# EAGLE board PCB (EAGLE 9.7.0)
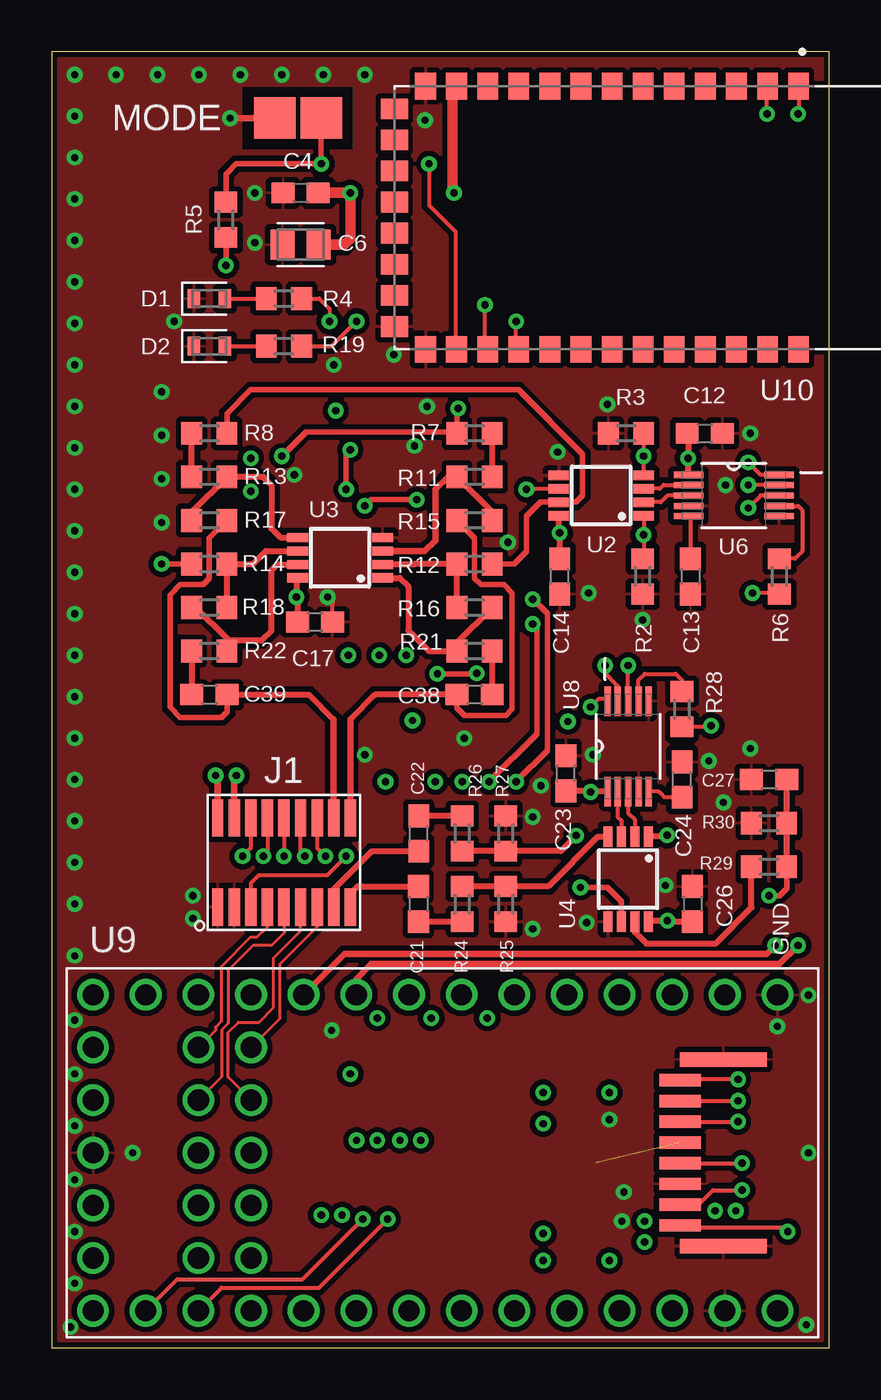
[diagram p0: board, top side]
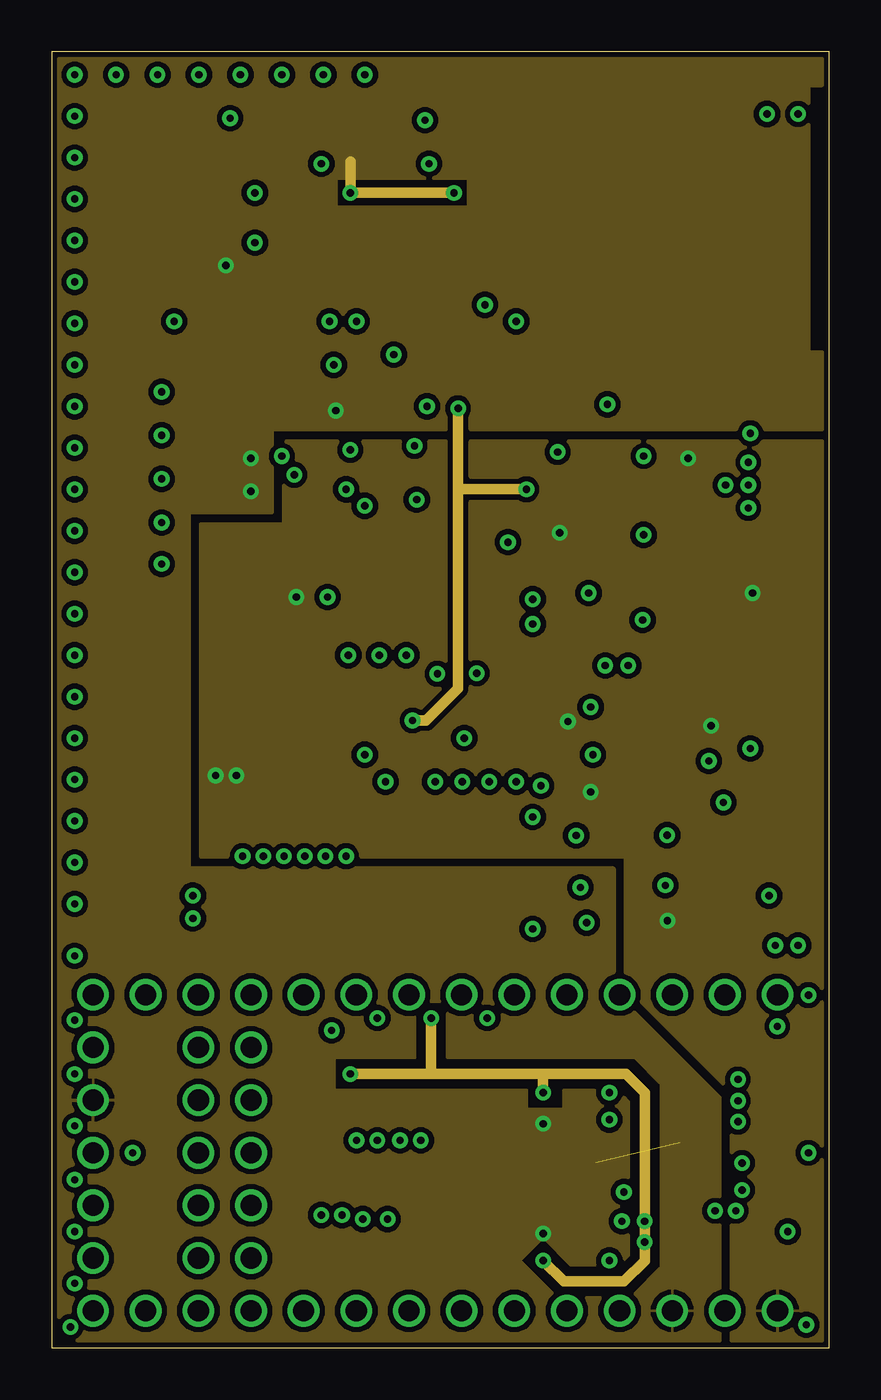
[diagram p1: board, inner layer Route2]
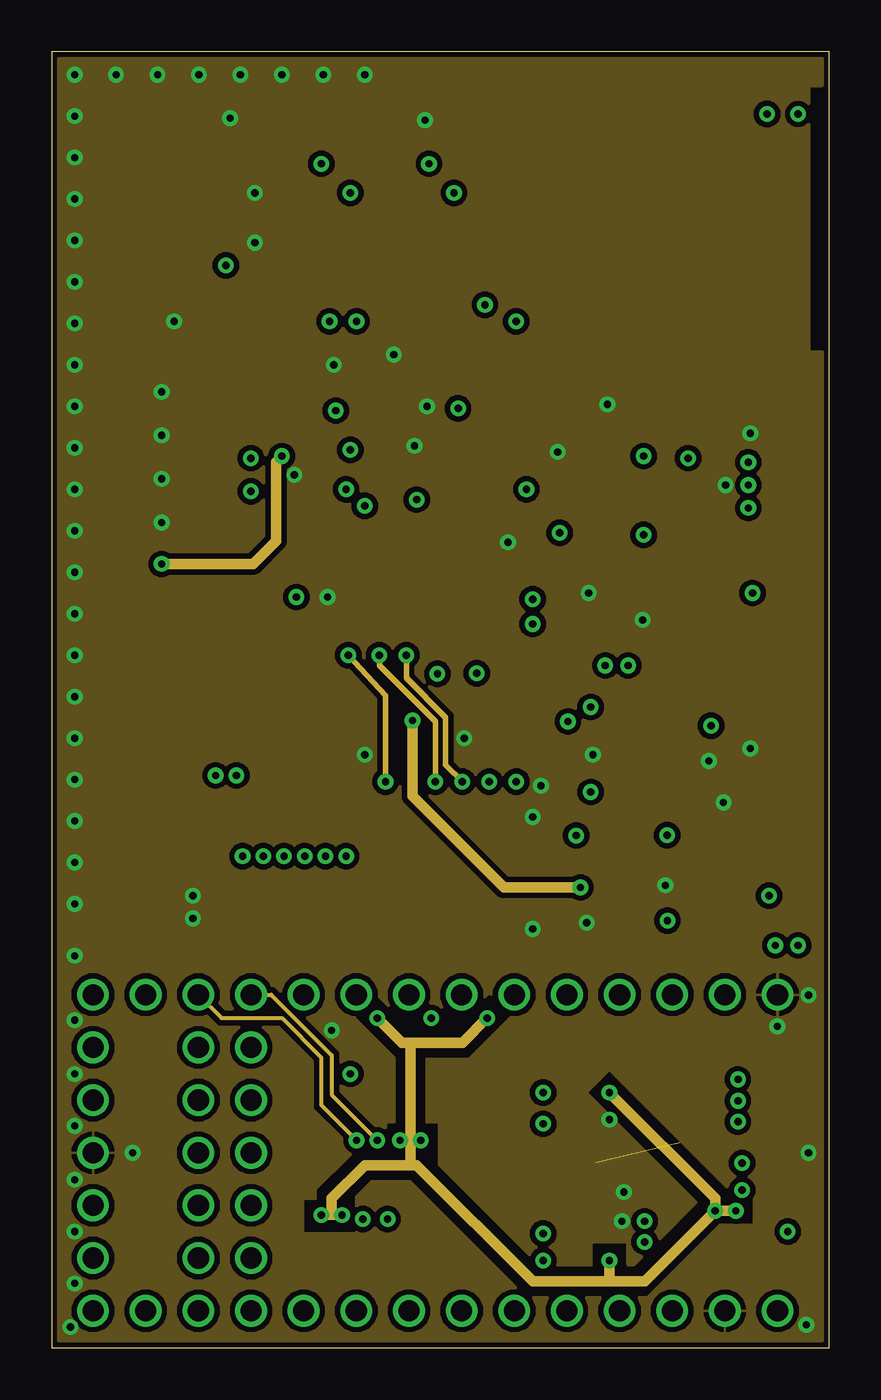
[diagram p2: board, inner layer Route15]
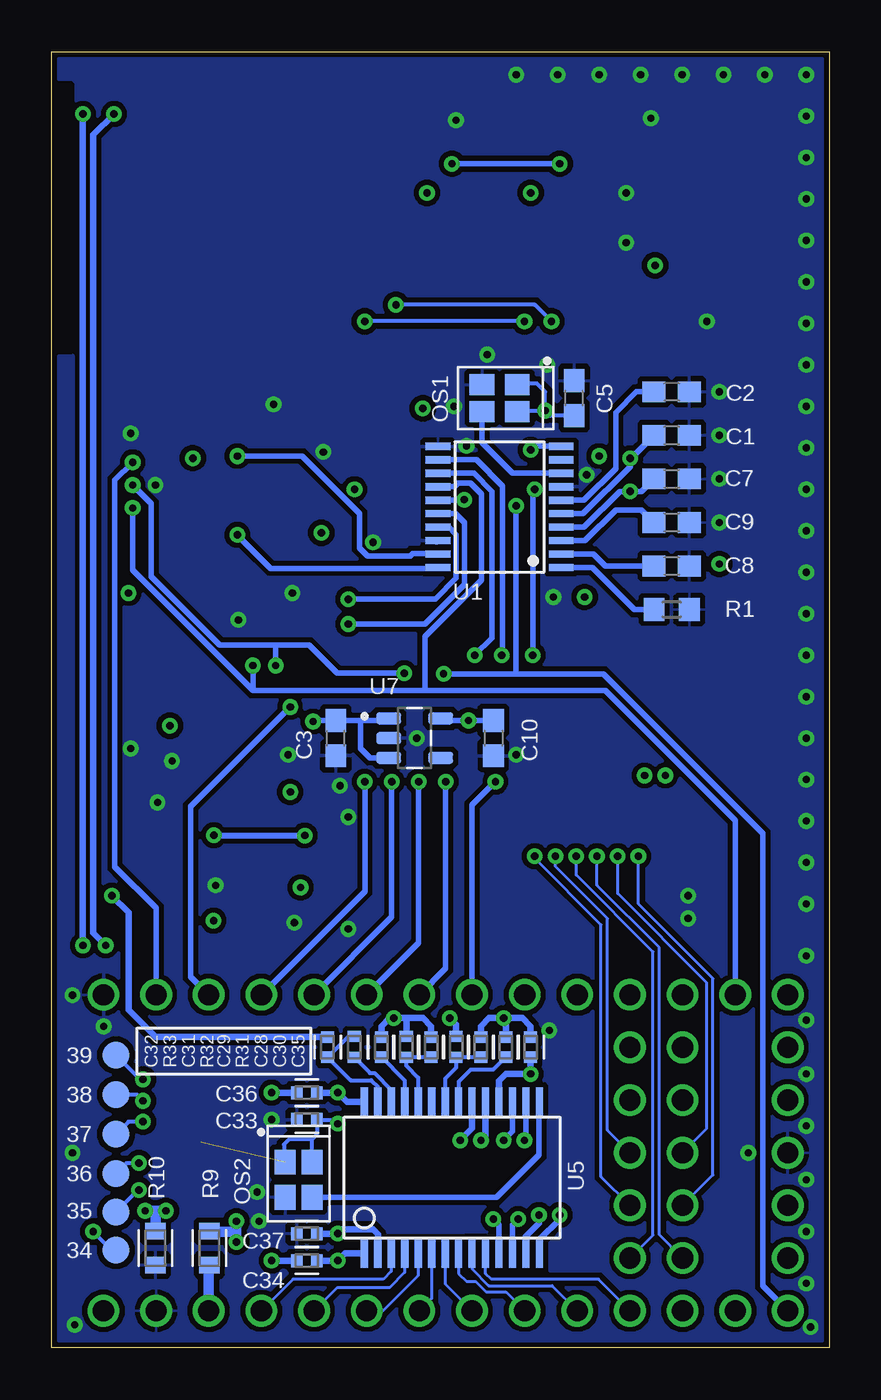
[diagram p3: board, bottom side, seen from below]

Size 37.5 x 62.5 mm. Coordinates in mm from the lower left corner, seen from the top.
Outline: 0,0 37.5,0 37.5,62.5 0,62.5 0,0
Copper layers (1+2*15+16): Top 0.035mm / dielectric 1.5mm / Route2 0.035mm / dielectric 0.15mm / Route15 0.035mm / dielectric 0.2mm / Bottom 0.035mm
Design rules "default *": minimum track width 6mil, minimum drill 0.35mm, track to track 6mil, track to pad 6mil, pad to pad 6mil, via to via 6mil, smd to smd 6mil, copper to edge 10mil, drill to drill 6mil, minimum pad ring 10mil, minimum via ring 8mil, stop-mask expansion 2mil, vias tented up to drill 15mil, thermal gap 10mil
tKeepout: area 0,18.6 to 6,62.5

## Footprints (pad centres in the part's own frame; a part is rotated, then mirrored left to right if it is on the bottom)
TP13R = smd 1.3 x 1.3: TP 0,0
C0603 = smd 1.1 x 1: 1 -0.85,0; 2 0.85,0
CAPC2012X110 = smd 1.165 x 1.465: 1 -0.875,0; 2 0.875,0
CAPC1005X60 = smd 0.56 x 0.629: 1 -0.485,0; 2 0.485,0
LEDC1608X65N_RND-R = smd 0.612 x 0.912: A 0.75,0; C -0.75,0
MOLEX_53307-1871 = smd 0.55 x 1.8: P$1 3.2,2.15; P$2 3.2,-2.15; P$3 2.4,2.15; P$4 2.4,-2.15; P$5 1.6,2.15; P$6 1.6,-2.15; P$7 0.8,2.15; P$8 0.8,-2.15; P$9 0,2.15; P$10 0,-2.15; P$11 -0.8,2.15; P$12 -0.8,-2.15; P$13 -1.6,2.15; P$14 -1.6,-2.15; P$15 -2.4,2.15; P$16 -2.4,-2.15; P$17 -3.2,2.15; P$18 -3.2,-2.15
2.5X2-4-PAD = smd 1.2 x 1: 1 -0.85,-0.65; 2 0.85,-0.65; 3 0.85,0.65; 4 -0.85,0.65
R0603 = smd 1 x 1.1: 1 -0.85,0; 2 0.85,0
RESC1608X60 = smd 0.799 x 0.974: 1 -0.815,0; 2 0.815,0
RESC1005X40 = smd 0.535 x 0.644: 1 -0.507,0; 2 0.507,0
TP20SQ = smd 2 x 2: TP 0,0
TSSOP20 = smd 0.35 x 1.2: 1 -2.275,-2.97; 2 -1.625,-2.97; 3 -0.975,-2.97; 4 -0.325,-2.97; 5 0.325,-2.97; 6 0.975,-2.97; 7 1.625,-2.97; 8 2.275,-2.97; 9 2.925,-2.97; 10 3.575,-2.97; 11 3.575,2.97; 12 2.925,2.97; 13 2.275,2.97; 14 1.625,2.97; 15 0.975,2.97; 16 0.325,2.97; 17 -0.325,2.97; 18 -0.975,2.97; 19 -1.625,2.97; 20 -2.275,2.97
MSOP8 = smd 0.45 x 1: 1 -0.975,-2.05; 2 -0.325,-2.05; 3 0.325,-2.05; 4 0.975,-2.05; 5 0.975,2.05; 6 0.325,2.05; 7 -0.325,2.05; 8 -0.975,2.05
SSOP28BU = smd 0.348 x 1.397: 1 -4.225,-3.656; 2 -3.575,-3.656; 3 -2.925,-3.656; 4 -2.275,-3.656; 5 -1.625,-3.656; 6 -0.975,-3.656; 7 -0.325,-3.656; 8 0.325,-3.656; 9 0.975,-3.656; 10 1.625,-3.656; 11 2.275,-3.656; 12 2.925,-3.656; 13 3.575,-3.656; 14 4.225,-3.656; 15 4.225,3.656; 16 3.575,3.656; 17 2.925,3.656; 18 2.275,3.656; 19 1.625,3.656; 20 0.975,3.656; 21 0.325,3.656; 22 -0.325,3.656; 23 -0.975,3.656; 24 -1.625,3.656; 25 -2.275,3.656; 26 -2.925,3.656; 27 -3.575,3.656; 28 -4.225,3.656
SOP50P490X110-10N = smd 1.422 x 0.305: 1 -2.184,0.991; 2 -2.184,0.508; 3 -2.184,0; 4 -2.184,-0.508; 5 -2.184,-0.991; 6 2.184,-0.991; 7 2.184,-0.508; 8 2.184,0; 9 2.184,0.508; 10 2.184,0.991
SOT95P280X145-5N = smd 1.21 x 0.59: 1 -1.255,0.95; 2 -1.255,0; 3 -1.255,-0.95; 4 1.255,-0.95; 5 1.255,0.95
MODULE_DEV-15583 = drill 1.02: 0 -7.62,13.97; 1 -7.62,11.43; 2 -7.62,8.89; 3 -7.62,6.35; 3.3V_1 -2.54,-16.51; 3.3V_2 7.62,11.43; 4 -7.62,3.81; 5 -7.62,1.27; 6 -7.62,-1.27; 7 -7.62,-3.81; 8 -7.62,-6.35; 9 -7.62,-8.89; 10 -7.62,-11.43; 11 -7.62,-13.97; 12 -7.62,-16.51; 13 7.62,-16.51; 14 7.62,-13.97; 15 7.62,-11.43; 16 7.62,-8.89; 17 7.62,-6.35; 18 7.62,-3.81; 19 7.62,-1.27; 20 7.62,1.27; 21 7.62,3.81; 22 7.62,6.35; 23 7.62,8.89; 24 5.08,-11.43; 25 5.08,-8.89; 26 2.54,-11.43; 27 2.54,-8.89; 28 0,-11.43; 29 0,-8.89; 30 -2.54,-11.43; 31 -2.54,-8.89; 32 -5.08,-11.43; 33 -5.08,-8.89; G_1 -7.62,16.51; G_2 0,-16.51; G_3 7.62,13.97; ON-OFF 5.08,-16.51; PGM 2.54,-16.51; VBAT -5.08,-16.51; VIN 7.62,16.51 | smd 0.6 x 2: 3.3V_3 -0.5,11.8; 34 3.5,11.8; 35 2.5,11.8; 36 0.5,11.8; 37 -1.5,11.8; 38 -2.5,11.8; 39 -3.5,11.8; G_4 1.5,11.8 | smd 0.7 x 4.2: G_5 4.5,13.9; G_6 -4.5,13.9
HM-10 = smd 1.3 x 1: 1 -6.35,6.325; 2 -6.35,4.825; 3 -6.35,3.325; 4 -6.35,1.825; 5 -6.35,0.325; 6 -6.35,-1.175; 7 -6.35,-2.675; 8 -6.35,-4.175; 9 -6.35,-5.675; 10 -6.35,-7.175; 11 -6.35,-8.675; 12 -6.35,-10.175; 13 -6.35,-11.675; 22 6.35,-11.675; 23 6.35,-10.175; 24 6.35,-8.675; 25 6.35,-7.175; 26 6.35,-5.675; 27 6.35,-4.175; 28 6.35,-2.675; 29 6.35,-1.175; 30 6.35,0.325; 31 6.35,1.825; 32 6.35,3.325; 33 6.35,4.825; 34 6.35,6.325 | smd 1 x 1.3: 14 -5.25,-13.175; 15 -3.75,-13.175; 16 -2.25,-13.175; 17 -0.75,-13.175; 18 0.75,-13.175; 19 2.25,-13.175; 20 3.75,-13.175; 21 5.25,-13.175

## Placement (x,y rotation side)
34  TPTP13R  [TP13R]  34.4,4.7 0 bottom
35  TPTP13R  [TP13R]  34.4,6.55 0 bottom
36  TPTP13R  [TP13R]  34.4,8.4 0 bottom
37  TPTP13R  [TP13R]  34.4,10.3 0 bottom
38  TPTP13R  [TP13R]  34.4,12.2 0 bottom
39  TPTP13R  [TP13R]  34.4,14.1 0 bottom
C1  0.1u  [C0603]  7.6,44 180 bottom
C2  0.1u  [C0603]  7.6,46.1 180 bottom
C3  1u  [C0603]  23.8,29.4 90 bottom
C4  0.1u  [C0603]  12,55.7 0 top
C5  0.1u  [C0603]  12.3,45.8 90 bottom
C6  10u  [CAPC2012X110]  12,53.2 0 top
C7  0.1u  [C0603]  7.6,41.9 0 bottom
C8  10n  [C0603]  7.6,37.7 0 bottom
C9  10n  [C0603]  7.6,39.8 0 bottom
C10  1u  [C0603]  16.2,29.4 270 bottom
C12  0.1u  [C0603]  31.5,44.1 0 top
C13  1u  [C0603]  30.8,37.2 270 top
C14  0.1u  [C0603]  24.5,37.2 90 top
C17  0.1u  [C0603]  12.7,35 180 top
C21  47n  [C0603]  17.68,21.4 270 top
C22  47n  [C0603]  17.7,24.8 90 top
C23  0.1u  [C0603]  24.8,27.7 90 top
C24  1u  [C0603]  30.4,27.4 90 top
C26  0.1u  [C0603]  30.9,21.4 270 top
C27  100p  [C0603]  34.6,27.4 180 top
C28  0.1u  [CAPC1005X60]  16.8,14.5 270 bottom
C29  0.1u  [CAPC1005X60]  19.2,14.5 270 bottom
C30  0.1u  [CAPC1005X60]  15.6,14.5 270 bottom
C31  0.1u  [CAPC1005X60]  21.6,14.5 270 bottom
C32  2.7n  [CAPC1005X60]  24.2,14.5 270 bottom
C33  0.1u  [CAPC1005X60]  25.2,11 180 bottom
C34  0.1u  [CAPC1005X60]  25.2,4.2 180 bottom
C35  0.1u  [CAPC1005X60]  14.4,14.5 90 bottom
C36  0.1u  [CAPC1005X60]  25.2,12.3 180 bottom
C37  0.1u  [CAPC1005X60]  25.2,5.5 180 bottom
C38  2.2u  [C0603]  20.4,31.5 180 top
C39  2.2u  [C0603]  7.6,31.5 0 top
D1  LED_RED  [LEDC1608X65N_RND-R]  7.6,50.6 0 top
D2  LED_RED  [LEDC1608X65N_RND-R]  7.6,48.3 0 top
J1  MOLEX_53307-1871  [MOLEX_53307-1871]  11.2,23.4 180 top
OS1  OSC-OE-IQXO-793  [2.5X2-4-PAD]  15.9,45.8 180 bottom
OS2  OSC-OE-IQXO-793  [2.5X2-4-PAD]  25.6,8.1 270 bottom
R1  20k  [R0603]  7.6,35.6 0 bottom
R2  220  [R0603]  28.5,37.2 270 top
R3  220  [R0603]  27.7,44.1 180 top
R4  470  [R0603]  11.2,50.6 180 top
R5  1k  [R0603]  8.4,54.4 270 top
R6  10k  [R0603]  35.1,37.2 270 top
R7  220  [R0603]  20.4,44.1 180 top
R8  220  [R0603]  7.6,44.1 0 top
R9  0  [RESC1608X60]  29.9,4.8 270 bottom
R10  0  [RESC1608X60]  32.5,4.8 270 bottom
R11  47k  [R0603]  20.4,42 180 top
R12  47k  [R0603]  20.4,37.8 180 top
R13  47k  [R0603]  7.6,42 0 top
R14  47k  [R0603]  7.6,37.8 0 top
R15  47k  [R0603]  20.4,39.9 180 top
R16  47k  [R0603]  20.4,35.7 180 top
R17  47k  [R0603]  7.6,39.9 0 top
R18  47k  [R0603]  7.6,35.7 0 top
R19  470  [R0603]  11.2,48.3 180 top
R21  220  [R0603]  20.4,33.6 180 top
R22  220  [R0603]  7.6,33.6 0 top
R24  47k  [R0603]  19.8,21.4 270 top
R25  47k  [R0603]  21.9,21.4 90 top
R26  47k  [R0603]  19.8,24.8 90 top
R27  47k  [R0603]  21.9,24.8 270 top
R28  10k  [R0603]  30.4,30.8 270 top
R29  4.7k  [R0603]  34.6,23.2 180 top
R30  10k  [R0603]  34.6,25.3 0 top
R31  1k  [RESC1005X40]  18,14.5 90 bottom
R32  1k  [RESC1005X40]  20.4,14.5 90 bottom
R33  47k  [RESC1005X40]  22.9,14.5 270 bottom
TP1  TPTP20SQ  [TP20SQ]  13,59.3 0 top
TP8  TPTP20SQ  [TP20SQ]  10.75,59.3 0 top
U1  AD5930  [TSSOP20]  15.9,39.9 90 bottom
U2  AD8220ARMZ  [MSOP8]  26.5,41.1 90 top
U3  ADA4841-2YRMZ  [MSOP8]  13.9,38.1 90 top
U4  AD8220ARMZ  [MSOP8]  27.8,22.6 180 top
U5  ADS901E  [SSOP28BU]  18.2,8.2 0 bottom
U6  AD5270BRMZ-100  [SOP50P490X110-10N]  32.9,41.1 0 top
U7  TLV73325PDBVT  [SOT95P280X145-5N]  20,29.4 0 bottom
U8  AD5270BRMZ-100  [SOP50P490X110-10N]  27.8,29 90 top
U9  DEV-15583  [MODULE_DEV-15583]  18.5,9.4 270 top
U10  HM-10  [HM-10]  29.7,54.5 270 top

## Library data of the parts
34-39 TP1 TP8 = testpad
C1-C5 C7-C10 C12-C14 C17 C21-C24 C26 C27 C38 C39 = rcl; SPICEPREFIX: C
C6 C28-C37 = Capacitor; CATEGORY: Capacitor
D1 D2 = LED; CATEGORY: LED; COLOR: RED; DESCRIPTION: CHIP LED ROUND; SUB-CATEGORY: CHIP; TYPE: ROUND_TOP
J1 = Molex 53307-1871
OS1 OS2 = IQD-Frequency-Products
R1-R8 R11-R19 R21 R22 R24-R30 = rcl; SPICEPREFIX: R
R9 R10 R31-R33 = Resistor; CATEGORY: Resistor; SUB-CATEGORY: Fixed
U1 = AD5930; AVAILABILITY: In Stock; DESCRIPTION: Direct Digital Synthesis IC 10 b 50MHz 24 b Tuning 20-TSSOP; MF: Analog Devices; MP: AD5930; PACKAGE: TSSOP-20 Analog Devices; PRICE: None
U2-U4 = ESP32_EIT
U5 = burr-brown; MF: TEXAS INSTRUMENT CONNECTORS; MPN: ADS901E; OC_FARNELL: 1509526; OC_NEWARK: 35C1591
U6 U8 = AD5270BRMZ-100; AVAILABILITY: In Stock; DESCRIPTION: Digital Potentiometer 100k Ohm 1 Circuit 1024 Taps SPI Interface 10-MSOP; MF: Analog Devices; MP: AD5270BRMZ-100; PACKAGE: MSOP-10 Analog Devices; PRICE: None
U7 = TLV73325PDBVT; AVAILABILITY: In Stock; DESCRIPTION: 300-mA, capacitor-free, low-IQ, low-dropout voltage regulator with enable 5-SOT-23 -40 to 125; MF: Texas Instruments; MP: TLV73325PDBVT; PACKAGE: SOT-23-5 Texas Instruments; PRICE: None; PURCHASE-URL: https://pricing.snapeda.com/search/part/TLV73325PDBVT/?ref=eda
U9 = DEV-15583; AVAILABILITY: In Stock; DESCRIPTION: RT1062 Teensy 4.0 i.MX ARM® Cortex®-M7 MPU Embedded Evaluation Board; MF: SparkFun Electronics; MP: DEV-15583; PACKAGE: None; PRICE: None; PURCHASE-URL: https://pricing.snapeda.com/search/part/DEV-15583/?ref=eda
U10 = HM-10; AVAILABILITY: No availability data; DESCRIPTION: Bluetooth to Serial Port Module; MF: ITead Studio; MP: HC-05; PACKAGE: Module ITead Studio; PRICE: None

## Nets
2.5V: C10.1 R7.2 R14.1 U2.6 U4.6 U7.5
+3V3 [Pour]: C1.2 C4.2 C5.1 C6.2 C7.1 C33.1 C37.1 OS1.1 OS1.4 OS2.1 OS2.4 R5.2 R9.2 U1.4 U1.5 U5.2 U9.3.3V_1 U9.3.3V_2 U9.3.3V_3 U10.12
+5V [Pour]: C3.2 C12.1 C14.2 C17.2 C23.1 C26.2 J1.P$2 J1.P$4 R6.2 R28.2 U2.8 U3.8 U4.8 U6.1 U7.1 U7.3 U8.1 U9.VIN
+V: C34.1 C35.1 C36.1 R9.1 R31.2 U5.1 U5.18 U5.28
ADC_0: U5.12 U9.14
ADC_1: U5.11 U9.15
ADC_2: U5.10 U9.16
ADC_3: U5.9 U9.17
ADC_4: U5.8 U9.18
ADC_5: U5.7 U9.19
ADC_6: U5.6 U9.20
ADC_7: U5.5 U9.21
ADC_8: U5.4 U9.22
ADC_9: U5.3 U9.23
AGND: C28.1 C29.1 C30.1 C31.1 C34.2 C35.2 C36.2 R10.1 R32.2 U5.13 U5.14 U5.19 U5.20
CS_AD5930: U1.16 U9.3
CS_DRIVE: U6.10 U9.0
CS_MEAS: U8.10 U9.1
CS_MUX1: J1.P$10 U9.24
CS_MUX2: J1.P$8 U9.28
CS_MUX3: J1.P$9 U9.30
CS_MUX4: J1.P$7 U9.32
CS_MUX5: J1.P$14 U9.29
CS_MUX6: J1.P$12 U9.25
CS_MUX7: J1.P$13 U9.33
CS_MUX8: J1.P$11 U9.31
CTRL: U1.13 U9.4
GND [Pour]: C1.1 C2.1 C3.1 C4.1 C5.2 C6.1 C7.2 C8.2 C9.2 C10.2 C12.2 C13.2 C14.1 C17.1 C23.2 C24.2 C26.1 C27.2 C33.2 C37.2 D1.C D2.C J1.P$1 J1.P$3 OS1.2 OS2.2 R1.2 R2.2 R3.2 R10.2 R25.1 R27.1 R30.1 TP8.TP U1.7 U1.11 U1.18 U2.5 U3.4 U4.5 U6.4 U6.6 U7.2 U8.4 U8.6 U9.G_1 U9.G_2 U9.G_3 U9.G_4 U9.G_5 U9.G_6 U10.13 U10.21 U10.22
H_DAT: J1.P$6 U9.26
H_SCLK: J1.P$5 U9.27
INT: U1.12 U9.5
MSB: U1.10 U9.6
N$1: R1.1 U1.1
N$2: C8.1 U1.2
N$3: C9.1 U1.3
N$4: R2.1 U1.20 U2.1
N$5: R3.1 U1.19 U2.4
N$6: R7.1 R11.1
N$7: R8.1 R13.1
N$8: R14.2 R18.2 U3.6
N$9: R13.2 R17.1 U3.5
N$10: R11.2 R15.1 U3.3
N$11: R12.2 R16.2 U3.2
N$12: R16.1 R21.2 U3.1
N$13: OS1.3 U1.8
N$14: C2.2 U1.6
N$15: R18.1 R22.2 U3.7
N$16: R6.1 U6.7
N$17: C22.1 J1.P$15
N$18: C21.1 J1.P$17
N$19: U2.2 U6.3
N$20: R8.2 R12.1 U2.7
N$21: U2.3 U6.2
N$22: C13.1 U6.5
N$23: R28.1 U8.7
N$24: R33.2 U5.26
N$25: C32.2 R33.1 U5.27
N$26: C24.1 U8.5
N$27: C28.2 R31.1 U5.22
N$28: C29.2 R32.1 U5.24
N$29: C31.2 U5.25
N$30: C30.2 U5.21
N$31: U4.2 U8.3
N$32: OS2.3 U5.15
N$33: R29.2 U4.7
N$34: C21.2 R24.2
N$35: R24.1 R25.2 U4.4
N$36: R26.1 R27.2 U4.1
N$37: C22.2 R26.2
N$38: C38.2 J1.P$18 R15.2
N$39: U4.3 U8.2
N$40: C27.1 C32.1 R29.1 R30.2
N$41: D1.A R4.2
N$42: R5.1 TP1.TP U10.23
N$43: R4.1 U10.24
N$44: D2.A R19.2
N$45: R19.1 U10.25
N$46: 39.TP U9.39
N$47: 38.TP U9.38
N$48: 37.TP U9.37
N$49: 36.TP U9.36
N$50: 35.TP U9.35
N$51: 34.TP U9.34
N$84: C39.2 J1.P$16 R17.2
N$85: C38.1 R21.1
N$86: C39.1 R22.1
OE: U5.16 U9.10
PWR: U5.17 U9.9
RX: U9.7 U10.1
STBY: U1.17 U9.2
TX: U9.8 U10.2
V_DAT: U1.14 U6.8 U8.8 U9.11
V_SCLK: U1.15 U6.9 U8.9 U9.13
VBAT: U9.VBAT

## Tracks (layer width: path | path; a pad name or v marks a point on that pad's centre or on a via)
2.5V  (via drill 0.35)
  Top 0.2: U2.6 24.43,41.4 v22.9,41.4
  Top 0.254: v19.6,45.3 19.55,45.25 R7.2 19.49,44.16 12.26,44.16 v11.1,43 | v5.3,37.8 R14.1 | U4.6 27.48,21.52 26.8,22.2 v25.5,22.2
  Route2 0.508: v19.6,45.3 19.6,41.4 | v22.9,41.4 19.6,41.4 | 19.6,41.4 19.6,31.8 18.05,30.25 v17.4,30.25
  Route15 0.508: v5.3,37.8 9.7,37.8 10.81,38.91 10.81,42.72 v11.1,43 | v17.4,30.25 17.4,26.6 21.8,22.2 v25.5,22.2
  Bottom 0.254: C10.1 v17.4,30.25 18.64,30.25 U7.5
+3V3  (via drill 0.35)  (1 unrouted)
  Top 0.254: R5.2 v8.4,52.2
  Top 0.508: C6.2 14.1,53.2 14.4,53.5 v14.4,55.7 C4.2 | U9.3.3V_3 | U10.12 19.32,60.65 19.32,55.77 v19.4,55.7
  Route2 0.508: v19.4,55.7 v14.4,55.7 14.4,57.2
  Bottom 0.2: 25.11,9.12 OS2.4 24.95,10.05 | OS2.1 26.3,9 26.3,9.8 26.05,10.05 24.95,10.05 | OS1.4 15,45.2 v13.7,45.2 | C5.1 13.45,44.95 v13.7,45.2 | v13.7,45.2 13.7,46.1 14.1,46.5 15,46.5 OS1.1 | v23.7,10.8 23.9,11 C33.1 24.71,10.29 24.95,10.05
  Bottom 0.254: C1.2 9.55,42.9 v9.6,42.9 9.6,42.5 11.88,40.23 U1.5 | C7.1 9.05,41.3 v9.6,41.3 10.1,41.3 11.82,39.58 U1.4
  Bottom 0.305: U5.2 21.77,5.47 22,5.7 23.5,5.7 v23.7,5.5 C37.1
  Bottom 0.508: R9.2 29.93,3.96 U9.3.3V_2
  pour Route2 (isolate 0.254): 32.3,0 32.3,12.1 27.2,17.2 27.2,23.2 6.7,23.2 6.7,40.2 10.7,40.2 10.7,44.2 37.5,44.2 37.5,62.5 0,62.5 0,0
+5V  (via drill 0.35)
  Top 0.2: R28.2 31.75,29.95 v31.8,30 | R6.2 35.05,36.4 v33.8,36.4
  Top 0.3: U2.8 24.45,39.35 v24.5,39.3 C14.2 | U6.1 30.72,42.88 v30.7,42.9 30.7,44.05 C12.1 | C17.2 11.85,36.15 v11.8,36.2 11.8,37.08 U3.8 | C23.1 25.95,26.85 v26,26.8 26.02,26.82 U8.1 | C26.2 29.75,20.55 v29.7,20.6 28.82,20.6 U4.8
  Top 0.305: J1.P$2 8,27.5 v7.9,27.6 | J1.P$4 8.8,27.5 v8.9,27.6
  Bottom 0.254: U7.1 21.36,30.25 22.6,30.25 | 22.6,30.25 C3.2 24.85,30.25 v24.9,30.2 | 22.6,30.25 22.6,28.9 22.15,28.45 U7.3
  pour Route2 (isolate 0.254): 37.5,0 37.5,43.8 11.1,43.8 11.1,39.8 7.1,39.8 7.1,23.6 27.6,23.6 27.6,17.4 32.7,12.3 32.7,0
+V  (via drill 0.35)
  Route2 0.508: v14.4,13.2 18.3,13.2 | 18.3,13.2 23.7,13.2 | 23.7,13.2 27.7,13.2 28.6,12.3 v28.6,6.1 v28.6,5.1 28.6,4.2 27.6,3.2 24.7,3.2 v23.7,4.2 | v23.7,12.3 23.7,13.2 | v18.3,15.9 18.3,13.2
  Bottom 0.305: C35.1 v14.4,13.2 15.6,13.2 15.93,12.88 U5.18 | U5.1 23.36,4.54 v23.7,4.2 C34.1 | U5.28 23.26,11.86 v23.7,12.3 C36.1 | R31.2 18,15.6 v18.3,15.9
  Bottom 0.508: v28.6,6.1 28.6,5.6 | 28.6,5.6 v28.6,5.1 | R9.1 29.89,5.6 28.6,5.6
ADC_0  (via drill 0.35)
  Top 0.2: U9.14 6.05,3.3 12.1,3.3 v15,6.2
  Bottom 0.254: U5.12 15.28,5.92 v15,6.2
ADC_1  (via drill 0.35)
  Top 0.2: U9.15 8.19,2.9 12.9,2.9 v16.2,6.2
  Bottom 0.254: U5.11 15.93,5.92 v16.2,6.2
ADC_2
  Bottom 0.152: U9.16 11.13,3.3 16.3,3.3 16.57,3.58 U5.10
ADC_3
  Bottom 0.152: U9.17 13.36,3 16.43,3 17.23,3.79 U5.9
ADC_4
  Bottom 0.152: U5.8 17.88,3.58 17.49,3.19 17.05,3.19 16.55,2.69 15.6,2.69 U9.18
ADC_5
  Bottom 0.152: U5.7 18.52,3.08 U9.19
ADC_6
  Bottom 0.152: U5.6 19.18,2.38 U9.20
ADC_7
  Bottom 0.152: U5.5 19.82,3.48 21.52,1.78 U9.21
ADC_8
  Bottom 0.152: U5.4 20.48,3.62 21.2,2.9 23.73,2.9 U9.22
ADC_9
  Bottom 0.152: U5.3 21.12,3.67 21.5,3.3 25.87,3.3 U9.23
AGND  (via drill 0.35)
  Route15 0.508: v13,6.4 13.5,6.4 | 13.5,6.4 v14,6.4 | v16.8,10 17.3,10 | v17.8,10 17.3,10 | v15.7,15.9 16.9,14.7 17.3,14.7 | 17.3,14.7 19.8,14.7 v21,15.9 | 17.3,10 17.3,14.7 | 13.5,6.4 13.5,7.2 15.1,8.8 17.3,8.8 | 17.3,10 17.3,8.8 | v32,6.6 28.6,3.2 26.9,3.2 | v32,6.6 v33,6.6 | 26.9,3.2 23.2,3.2 17.6,8.8 17.3,8.8 | v26.9,4.2 26.9,3.2 | v26.9,12.3 32,7.2 v32,6.6
  Bottom 0.305: C34.2 v26.9,4.2 | C35.2 14.4,15.5 14.8,15.9 v15.7,15.9 | C28.1 16.8,15.5 16.4,15.9 v15.7,15.9 | C29.1 19.2,15.5 19.6,15.9 20.4,15.9 | 20.4,15.9 v21,15.9 21.2,15.9 21.6,15.5 C31.1 | U5.19 16.57,10.22 v16.8,10 | U5.20 17.23,10.57 v17.8,10 | U5.13 14.62,5.38 14,6 v14,6.4 | U5.14 13.97,5.22 13,6.2 v13,6.4 | C36.2 v26.9,12.3 | C30.1 15.6,15.8 v15.7,15.9 | R32.2 20.4,15.9
  Bottom 0.508: v32,6.6 32.5,6.6 | 32.5,6.6 v33,6.6 | R10.1 32.5,6.6
CS_AD5930  (via drill 0.35)
  Top 0.254: v23.2,34.9 23.4,34.7 23.4,29.6 v21.1,27.3
  Bottom 0.254: U1.16 18.02,40.23 17.58,39.78 17.58,36.82 19.5,34.9 v23.2,34.9 | v21.1,27.3 21.1,20.77 U9.3
CS_DRIVE  (via drill 0.35)
  Top 0.2: U6.10 34.21,42.09 v33.6,42.7
  Bottom 0.254: U9.0 32.47,21.2 34.46,23.19 34.46,41.84 v33.6,42.7
CS_MEAS  (via drill 0.35)
  Top 0.2: U8.10 26.81,31.3 26.4,31.3 v26,30.9
  Bottom 0.254: U9.1 30.8,17.89 30.8,26.1 v26,30.9
CS_MUX1  (via drill 0.35)
  Top 0.2: J1.P$10 v11.2,23.7
  Bottom 0.152: v11.2,23.7 11.2,22.3 8.2,19.3 8.2,5.45 U9.24
CS_MUX2  (via drill 0.35)
  Top 0.2: v10.2,23.7 10.4,23.9 J1.P$8
  Bottom 0.152: v10.2,23.7 10.2,21.9 5.91,17.61 5.91,10.57 U9.28
CS_MUX3
  Top 0.152: J1.P$9 11.2,20 10.6,19.4 9.7,19.4 8.5,18.2 8.5,15.63 8.2,15.33 8.2,13.07 U9.30
CS_MUX4
  Top 0.152: U9.32 7.89,15.3 7.89,15.45 8.2,15.76 8.2,18.39 9.6,19.8 9.9,19.8 10.4,20.3 J1.P$7
CS_MUX5  (via drill 0.35)
  Top 0.2: v13.2,23.7 12.8,24.1 J1.P$14
  Bottom 0.152: v13.2,23.7 13.2,23.2 10.7,20.7 10.7,10.49 U9.29
CS_MUX6  (via drill 0.35)
  Top 0.2: v12.2,23.7 12,23.9 J1.P$12
  Bottom 0.152: U9.25 8.5,5.43 8.5,19.1 12.2,22.8 v12.2,23.7
CS_MUX7
  Top 0.152: U9.33 11,15.87 11,18.5 12.8,20.3 J1.P$13
CS_MUX8
  Top 0.152: U9.31 8.5,13.05 8.5,15.2 9,15.7 9.99,15.7 10.7,16.4 10.7,18.8 12,20.1 J1.P$11
CTRL  (via drill 0.35)
  Route15 0.254: v17.1,33.4 17.1,32.3 19,30.4 19,28.1 v19.8,27.3
  Bottom 0.254: v17.1,33.4 16.26,34.24 16.26,41.29 17.14,42.17 U1.13 | v19.8,27.3 19.8,19.53 U9.4
GND  (via drill 0.35)
  Top 0.203: C17.1 13.55,35.95 v13.3,36.2
  Top 0.305: TP8.TP v8.6,59.3
  Bottom 0.254: 18.95,38.85 U1.18
  other vias: 22,38.85 35,15.5 36.5,17 36.4,1.1 0.9,1 3.9,9.4 1.1,3.1 1.1,5.6 1.1,8.1 1.1,10.7 1.1,13.2 1.1,15.8 1.1,18.9 36.5,9.4 1.1,61.4 3.1,61.4 5.1,61.4 7.1,61.4 9.1,61.4 11.1,61.4 13.1,61.4 15.1,61.4 1.1,59.4 1.1,57.4 1.1,55.4 1.1,53.4 1.1,51.4 1.1,49.4 1.1,47.4 1.1,45.4 1.1,43.4 1.1,41.4 1.1,39.4 1.1,37.4 1.1,35.4 1.1,33.4 1.1,31.4 1.1,29.4 1.1,27.4 1.1,25.4 1.1,23.4 1.1,21.4 6.8,21.8 6.8,20.7 25.8,20.5 29.6,22.3 26.1,28.6 31.7,28.3 33.7,28.9 32.4,26.3 23.2,25.6 23.2,20.2 33.7,44.1 28.5,35.1 32.5,41.6 26.8,45.5 24.4,43.2 25.9,36.4 17.5,43.5 11.7,42.1 9.8,53.3 5.9,49.5 9.8,55.7 18,59.2 16.5,47.9 5.3,46.1 5.3,44 5.3,41.9 5.3,39.8 18.1,45.4 13.6,47.4 15.1,28.6 23.6,27.1 19.9,29.4 13.5,15.3 26.9,11 27.6,7.5 27.5,6.1
  pour Top (isolate 0.254): 0,0 0,62.5 37.5,62.5 37.5,0
  pour Bottom (isolate 0.254): 0,0 0,62.5 37.5,62.5 37.5,0
  pour Route15 (isolate 0.254): 37.5,0 37.5,62.5 0,62.5 0,0
H_DAT  (via drill 0.35)
  Top 0.2: v9.2,23.7 9.6,24.1 J1.P$6
  Bottom 0.152: U9.26 5.6,8.33 5.6,17.8 9.2,21.4 v9.2,23.7
H_SCLK  (via drill 0.35)
  Top 0.2: v14.2,23.7 13.3,22.8 10,22.8 9.6,22.4 J1.P$5
  Bottom 0.152: U9.27 11,8.25 11,20.4 14.2,23.6 v14.2,23.7
INT  (via drill 0.35)
  Route15 0.254: v15.8,33.4 15.8,32.9 18.5,30.2 v18.5,27.3
  Bottom 0.254: U1.12 17.02,42.83 15.76,41.56 15.76,33.44 v15.8,33.4 | v18.5,27.3 18.5,18.29 U9.5
MSB  (via drill 0.35)
  Top 0.254: v14.4,43.3 14.2,43.1 v14.2,41.4
  Route15 0.254: v14.3,33.4 16.1,31.44 v16.1,27.3
  Bottom 0.254: U1.10 14.22,43.48 v14.4,43.3 | v14.2,41.4 14.3,41.3 v14.3,33.4 | v16.1,27.3 17.23,26.17 U9.6
N$1
  Bottom 0.254: U1.1 11.43,37.62 9.4,35.6 R1.1
N$2
  Bottom 0.254: C8.1 10.8,37.7 11.38,38.27 U1.2
N$3
  Bottom 0.254: U1.3 11.78,38.92 10.3,40.4 9.05,40.4 C9.1
N$4  (via drill 0.35)
  Top 0.2: R2.1 28.55,38.1 v28.55,39.2 U2.1
  Bottom 0.254: U1.20 18.91,37.59 26.94,37.59 v28.55,39.2
N$5  (via drill 0.35)
  Top 0.2: U2.4 v28.55,43 R3.1
  Bottom 0.254: v28.55,43 25.43,43 22.66,40.23 22.66,38.58 22.27,38.19 20.21,38.19 20.1,38.3 18.89,38.3 U1.19
N$6
  Top 0.3: R11.1 R7.1
N$7
  Top 0.3: R13.1 R8.1
N$8
  Top 0.3: R18.2 R14.2 9.7,37.8 10.32,38.42 U3.6
N$9
  Top 0.3: R17.1 6.75,40.3 R13.2 10.2,42 10.6,41.6 10.6,39.5 11.03,39.08 U3.5
N$10
  Top 0.3: R11.2 21.25,40.3 R15.1
  Top 0.305: R11.2 19.1,42 18.5,41.4 18.5,38.93 17.98,38.42 17.22,38.42 17.21,38.42 U3.3
N$11
  Top 0.3: R16.2 R12.2 17.5,37.8 17.48,37.77 U3.2
N$12
  Top 0.3: R16.1 19.55,34 R21.2 18.2,33.6 17.2,34.6 17.2,36.7 16.77,37.12 U3.1
N$13
  Bottom 0.254: U1.8 15.28,42.17 16.75,43.65 OS1.3
N$14
  Bottom 0.254: U1.6 11.82,40.88 10.3,42.4 10.3,44.3 10.3,44.6 10.3,45.1 9.3,46.1 C2.2
N$15
  Top 0.3: 8.45,34.2 6.95,35.7 R18.1 | 8.45,34.2 R22.2 | U3.7 10.88,37.77 10.6,37.5 10.6,34.6 10.1,34.1 8.55,34.1 8.45,34.2
N$16
  Top 0.2: U6.7 36.01,40.59 36.2,40.4 36.2,38.4 35.85,38.05 R6.1
N$17
  Top 0.3: 13.6,22.1 15.45,23.95 C22.1
  Top 0.305: J1.P$15 13.6,22.1
N$18
  Top 0.3: C21.1 14.75,22.25 14.4,21.9
  Top 0.305: J1.P$17 14.4,21.9
N$19
  Top 0.2: U2.2 29.38,40.77 29.7,41.1 U6.3
N$20
  Top 0.254: R8.2 8.45,45.05 9.6,46.2 22.5,46.2 25.6,43.1 25.6,41.1 25.27,40.77 U2.7 23.57,40.77 22.9,40.1 22.9,38.4 22.3,37.8 R12.1
N$21
  Top 0.2: U2.3 29.32,41.42 29.51,41.61 U6.2
N$22
  Top 0.2: U6.5 30.8,40.02 C13.1
N$23
  Top 0.2: U8.7 28.31,32.21 28.6,32.5 30.1,32.5 30.4,32.2 R28.1
N$24
  Bottom 0.2: R33.2 22.16,13.25 21.94,13.25 21.12,12.44 U5.26
N$25
  Bottom 0.2: U5.27 21.77,12.57 22.1,12.9 23.09,12.9 24.19,14.01 | 24.19,14.01 C32.2 | R33.1 23.19,15.01 24.19,14.01
N$26
  Top 0.2: U8.5 29.28,26.82 29.55,26.55 C24.1
N$27
  Bottom 0.2: R31.1 18,13.5 18.52,12.97 U5.22
  Bottom 0.203: C28.2 16.82,13.99 R31.1
N$28
  Bottom 0.2: R32.1 20.4,13.6 19.82,13.03 U5.24
  Bottom 0.203: C29.2 19.22,13.99 R32.1
N$29
  Bottom 0.2: U5.25 20.48,12.89 C31.2
N$30
  Bottom 0.2: U5.21 17.88,12.82 17.3,13.4 16.21,13.4 C30.2
N$31
  Top 0.2: U8.3 27.8,25.8 28.12,25.48 U4.2
N$32
  Bottom 0.254: U5.15 14,11.83 14,9.3 16.05,7.25 OS2.3
N$33
  Top 0.3: U4.7 28.12,20.05 28.68,19.5 32.02,19.5 33.75,21.22 R29.2
N$34
  Top 0.3: C21.2 R24.2
N$35
  Top 0.3: R24.1 R25.2 23.95,22.25 26.35,24.65 U4.4
N$36  (via drill 0.35)
  Top 0.3: R26.1 R27.2 24.55,23.95 v25.3,24.7 | v29.68,24.71 29.62,24.65 U4.1
  Bottom 0.3: v25.3,24.7 v29.67,24.7 v29.68,24.71
N$37
  Top 0.3: R26.2 C22.2
N$38
  Top 0.254: C38.2 19.55,30.85 19.9,30.5 21.9,30.5 22.2,30.8 22.2,36.4 21.8,36.8 20.7,36.8 20.4,37.1 20.4,39.05 R15.2
  Top 0.3: 14.4,30.3 15.6,31.5 C38.2
  Top 0.305: 14.4,30.3 J1.P$18
N$39
  Top 0.2: U4.3 27.48,25.43 27.29,25.61 U8.2
N$40  (via drill 0.35)
  Top 0.254: R29.1 35.45,22.15 35.1,21.8 v34.6,21.8
  Top 0.3: R29.1 R30.2 C27.1
  Bottom 0.305: C32.1 32.48,14.98 33.8,16.3 33.8,21 v34.6,21.8
N$41
  Top 0.2: D1.A R4.2
N$42  (via drill 0.35)
  Top 0.2: v18.2,57.1 18.2,55.1 19.48,53.82 19.48,48.19 U10.23
  Top 0.254: TP1.TP v13,57.1 8.9,57.1 8.4,56.6 R5.1
  Bottom 0.254: v13,57.1 v18.2,57.1
N$43  (via drill 0.35)
  Top 0.2: R4.1 12.9,50.6 13.4,50.1 v13.4,49.5 | U10.24 20.9,48.27 v20.9,50.3
  Bottom 0.2: v13.4,49.5 14.2,50.3 v20.9,50.3
N$44
  Top 0.2: D2.A R19.2
N$45  (via drill 0.35)
  Top 0.2: R19.1 13.5,48.3 v14.7,49.5 | U10.25 22.4,48.27 v22.4,49.5
  Bottom 0.2: v14.7,49.5 v22.4,49.5
N$46  (via drill 0.35)
  Top 0.2: v33.1,12.94 30.34,12.94 U9.39
  Bottom 0.2: 39.TP 33.24,12.94 v33.1,12.94
N$47  (via drill 0.35)
  Top 0.2: U9.38 v33.1,11.9
  Bottom 0.2: v33.1,11.9 33.4,12.2 38.TP
N$48  (via drill 0.35)
  Top 0.2: U9.37 v33.1,10.9
  Bottom 0.2: v33.1,10.9 33.8,10.9 37.TP
N$49  (via drill 0.35)
  Top 0.2: U9.36 v33.3,8.9
  Bottom 0.2: v33.3,8.9 33.9,8.9 36.TP
N$50  (via drill 0.35)
  Top 0.2: U9.35 31.2,6.9 31.9,7.6 v33.3,7.6
  Bottom 0.2: v33.3,7.6 33.35,7.6 35.TP
N$51  (via drill 0.35)
  Top 0.2: U9.34 30.4,5.8 35.3,5.8 v35.5,5.6
  Bottom 0.2: v35.5,5.6 34.6,4.7 34.TP
N$84
  Top 0.254: C39.2 8.45,30.65 8.2,30.4 6.2,30.4 5.7,30.9 5.7,36.3 6.2,36.8 7.3,36.8 7.6,37.1 7.6,39.05 R17.2
  Top 0.3: 13.6,30.3 12.4,31.5 C39.2
  Top 0.305: 13.6,30.3 J1.P$16
N$85
  Top 0.3: C38.1 R21.1
N$86
  Top 0.3: R22.1 C39.1
OE  (via drill 0.35)
  Route15 0.2: U9.10 8.19,15.9 11.1,15.9 13,14 13,11.7 v14.7,10
  Bottom 0.254: U5.16 14.62,10.07 v14.7,10
PWR  (via drill 0.35)
  Route15 0.2: U9.9 10.58,17.02 13.5,14.1 13.5,12.2 v15.7,10
  Bottom 0.254: U5.17 15.28,10.43 v15.7,10
RX  (via drill 0.35)
  Top 0.2: U10.1 36.02,59.52 v36,59.5
  Top 0.305: U9.7 14.69,17.79 15.4,18.5 35.1,18.5 v36,19.4
  Bottom 0.305: v36,19.4 v36,59.5
STBY  (via drill 0.35)
  Top 0.254: v23.2,36.1 23.9,35.4 23.9,28.8 v22.4,27.3
  Bottom 0.254: v23.2,36.1 19,36.1 17.99,37.11 17.99,39.22 18.35,39.58 U1.17 | v22.4,27.3 22.4,22.01 U9.2
TX  (via drill 0.35)
  Top 0.2: v34.5,59.5 34.5,60.83 U10.2
  Top 0.305: U9.8 14.13,19 34.5,19 v34.9,19.4
  Bottom 0.305: v34.9,19.4 35.5,20 35.5,58.5 v34.5,59.5
V_DAT  (via drill 0.35)
  Top 0.2: U6.8 34.2,41.1 v33.6,40.5 | U8.8 v27.8,32.9
  Bottom 0.254: U9.11 4.53,25.43 10.8,31.7 19.5,31.7 | 19.5,31.7 27.8,31.7 | v27.8,32.9 27.8,31.7 | U1.14 18.07,41.52 17.9,41.7 17.3,41.7 16.77,41.17 16.77,37.03 19.5,34.3 19.5,31.7 | 27.8,31.7 33.6,37.5 v33.6,40.5
V_SCLK  (via drill 0.35)
  Top 0.2: U6.9 v33.61,41.61 v33.6,41.6 | v26.7,32.9 26.7,32.51 27.29,31.92 U8.9
  Top 0.254: v18.6,32.5 20.47,32.5 v20.5,32.53 | v17.6,40.9 15.4,40.9 v15.1,40.6
  Bottom 0.254: U9.13 3.2,2.99 3.2,24.8 10.9,32.5 15.1,32.5 | 15.1,32.5 v18.6,32.5 | v20.5,32.53 23.73,32.53 25.1,33.9 26.7,33.9 | 26.7,33.9 29.4,33.9 32.7,37.2 32.7,40.7 v33.6,41.6 | v26.7,32.9 26.7,33.9 | U1.15 17.62,40.88 v17.6,40.9 | 15.1,32.5 v15.1,40.6
(copper drawn outside any net)
  shapes: Route15 area x2, Route2 area x3, Top area x1

## Text on the board
tNames: MODE